# EAGLE board BackscatterPlantSensor_v6_1tssop (EAGLE 6.4)
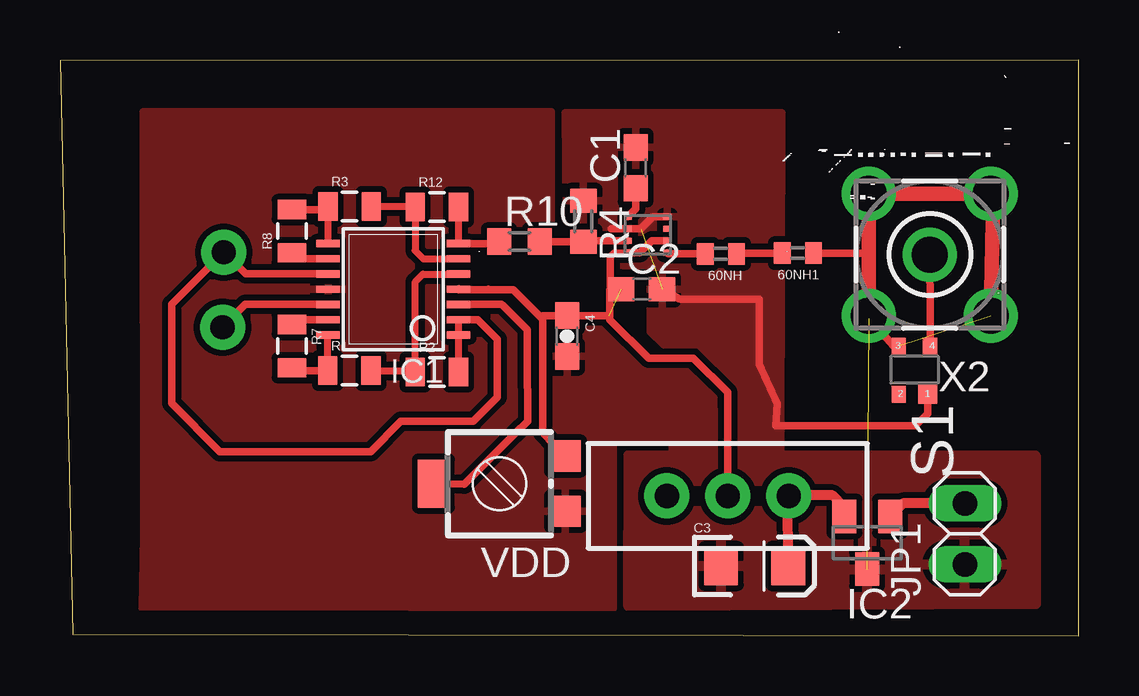
[diagram p0: board, top side]

Size 42.44 x 23.99 mm. Coordinates in mm from the lower left corner, seen from the top.
Outline: 0.53,0.05 42.44,0 42.44,23.99 0,23.95 0.53,0.05
Copper layers (1*16): Top 0.035mm / dielectric 1.5mm / Bottom 0.035mm
Design rules "default *": minimum track width 10mil, minimum drill 24mil, track to track 10mil, track to pad 10mil, pad to pad 10mil, via to via 10mil, smd to smd 10mil, copper to edge 40mil, drill to drill 8mil, minimum pad ring 10mil, minimum via ring 8mil, stop-mask expansion 4mil, vias tented up to drill 0mil, thermal gap 10mil

## Footprints (pad centres in the part's own frame; a part is rotated, then mirrored left to right if it is on the bottom)
C0402 = smd 0.7 x 0.9: 1 -0.65,0; 2 0.65,0
C0603 = smd 1.1 x 1: 1 -0.85,0; 2 0.85,0
EIA3216 = smd 1.4 x 1.6: A 1.4,0; C -1.4,0
0603-CAP = smd 1.1 x 1: 1 -0.85,0; 2 0.85,0
TSSOP14 = smd 0.305 x 0.991: 1 -1.905,-2.718; 2 -1.27,-2.718; 3 -0.635,-2.718; 4 0,-2.718; 5 0.635,-2.718; 6 1.27,-2.718; 7 1.905,-2.718; 8 1.905,2.718; 9 1.27,2.718; 10 0.635,2.718; 11 0,2.718; 12 -0.635,2.718; 13 -1.27,2.718; 14 -1.905,2.718
SOT23 = smd 1 x 1.4: 1 -0.95,-1.1; 2 0.95,-1.1; 3 0,1.1
1X02 = drill 1.016 long: 1 -1.27,0; 2 1.27,0
0805 = smd 0.8 x 1.2: 1 -0.9,0; 2 0.9,0
R0603 = smd 1 x 1.1: 1 -0.85,0; 2 0.85,0
SWITCH-SPDT = drill 1.016 pad 1.88: 1 0,2.54; 2 0,0; 3 0,-2.54
TDFN22-8 = smd 0.35 x 0.25: 1 -1.78,-0.7; 2 -1.78,-1.2; 3 -1.78,-1.7; 4 -1.78,-2.2; 5 -0.13,-2.2; 6 -0.13,-1.7; 7 -0.13,-1.2; 8 -0.13,-0.7
SOT343R = smd 0.8 x 0.8: 1 0.55,-1.07 | smd 0.6 x 0.7: 2 -0.66,-1.07; 3 -0.66,0.94; 4 0.65,0.94
1X01NS = drill 1.016 pad 1.88: 1 0,0
RTRIM3314G = smd 1.3 x 1.3: 1 1.15,-2.75; 3 -1.15,-2.75 | smd 2 x 1.3: 2 0,2.75
LTI-SASF54GT = drill 1.5 pad 2.2: 1 0,0; 2 -2.54,2.54; 3 2.54,2.54; 4 2.54,-2.54; 5 -2.54,-2.54

## Placement (x,y rotation side)
60NH  [C0402]  27.53,15.91 180 top
60NH1  [C0402]  30.74,15.94 180 top
C1  [C0603]  23.99,19.5 90 top
C2  [C0603]  24.23,14.44 0 top
C3  [EIA3216]  28.94,2.91 0 top
C4  [0603-CAP]  21.12,12.48 270 top
IC1  MCP604ST  [TSSOP14]  13.88,14.44 90 top
IC2  MAX6520  [SOT23]  33.63,3.88 180 top
JP1  [1X02]  37.7,4.24 90 top
R1  100K  [0805]  12.06,11.05 0 top
R2  100K  [0805]  15.7,10.99 0 top
R3  100K  [0805]  12.06,17.89 0 top
R4  [R0603]  21.81,17.27 270 top
R7  50K  [0805]  9.66,12.07 270 top
R8  50K  [0805]  9.66,16.86 90 top
R10  [R0603]  19.14,16.43 0 top
R12  100K  [0805]  15.7,17.87 0 top
S1  [SWITCH-SPDT]  27.83,5.83 270 top
U$1  [TDFN22-8]  23.53,15.26 180 top
U$4  BF1118SOT343R_NXP  [SOT343R]  35.61,11.13 0 top
V+  M01SMDNS  [1X01NS]  6.77,12.85 0 top
V-  M01SMDNS  [1X01NS]  6.82,15.98 270 top
VDD  [RTRIM3314G]  18.31,6.34 90 top
X2  LTI-SASF54GT  [LTI-SASF54GT]  36.24,15.88 180 top

## Library data of the parts
60NH 60NH1 R1-R3 R7 R8 R12 = SparkFun
C1 C2 = eagle-ltspice; SPICEMODEL: NONE; SPICEPREFIX: C
C3 = SparkFun-Capacitors
C4 = SparkFun-Passives
IC1 = linear
IC2 = maxim; MF: MAXIM; MPN: MAX6520EUR-T; OC_FARNELL: unknown; OC_NEWARK: 02J4586
JP1 = pinhead
R4 R10 VDD = rcl
S1 = semipassiveTag_library
U$1 = ts3002TDFN22_8pin
U$4 = rf_transistors
V+ V- = SparkFun-Connectors
X2 = con-coax; OC_FARNELL: unknown; OC_NEWARK: unknown

## Nets
AGND: C4.2 IC1.11 VDD.3
DGND: C1.2 C2.2 R4.1 U$1.4 U$1.6 U$4.1
DRAIN: U$4.4 X2.1
FOUT: 60NH.2 U$1.1
FOUT2: 60NH1.1 U$4.3 X2.2
GND: C3.C IC2.3 JP1.1 X2.3 X2.4 X2.5
N$1: C1.1 U$1.5
N$2: R4.2 R10.2 U$1.7
N$3: 60NH1.2 60NH.1
N$4: IC2.1 JP1.2
N$7: C3.A IC2.2 S1.1
N$12: IC1.3 VDD.2
N$13: IC1.13 R7.1
N$15: IC1.5 R1.2 R2.1
N$92: IC1.9 R8.1
N$93: IC1.8 R3.1 R8.2
N$96: IC1.14 R1.1 R7.2
N$100: IC1.6 R3.2 R12.1
V+: IC1.12 V+.1
VCOND: IC1.7 R10.1 R12.2
VDD: C2.1 C4.1 IC1.4 S1.2 U$1.2 U$1.8 VDD.1
VRF: IC1.1 IC1.2 IC1.10 R2.2 V-.1

## Tracks (layer width: path | path; a pad name or v marks a point on that pad's centre or on a via)
AGND
  pour Top: 23.05,8.27 27.27,8.23 27.25,9.91 26.06,11.05 24.66,11.06 23.14,12.58 23.14,15.2 23.02,15.33 20.47,15.33 20.47,21.84 3.46,21.82 3.48,4.2 3.43,1.15 6.17,1.15 23.05,1.13
DGND  (1 unrouted)
  Top 0.305: U$1.4 24.69,17.46 24.2,16.97 U$1.6 22.97,16.96 | 25.78,14.04 C2.2 25.87,14.02 29.14,14.02 29.12,11.31 29.89,9.67 29.83,8.74 35.64,8.74 36.16,9.26 U$4.1
  pour Top: 21.05,21.79 21.11,15.47 24.59,15.4 24.59,12.67 25.16,12.12 26.61,12.12 28.3,10.45 28.44,8.27 30.03,8.16 30.06,21.79
DRAIN
  Top 0.305: U$4.4 36.26,13.48 X2.1
FOUT
  Top 0.305: 60NH.2 25.35,15.91 U$1.1
FOUT2  (1 unrouted)
  Top 0.305: 38.83,18.35 38.81,18.24 | U$4.3 34.73,12.07 33.77,13.2 33.75,13.66 33.7,13.72 33.7,15.84 33.69,15.85 | 33.81,15.98 33.69,15.85 | 33.69,15.85 33.69,15.9 | 33.69,15.9 33.7,15.91 | 60NH1.1 33.65,15.94 33.69,15.9
  Top 0.61: 38.81,18.24 38.88,18.29 X2.2
GND  (1 unrouted)
  Top 0.305: X2.3 33.7,13.23 33.72,13.22 33.67,13.22 33.66,13.23 33.66,13.35 33.64,13.37
  Top 0.61: X2.3 X2.4 X2.5
  pour Top: 23.69,7.54 40.66,7.52 40.66,1.31 23.69,1.23
N$1
  Top 0.305: U$1.5 23.99,17.79 C1.1
N$2
  Top 0.305: R10.2 20.11,16.42 R4.2 22.17,16.46 U$1.7
N$3
  Top 0.305: 60NH1.2 28.21,15.93 60NH.1
N$4
  Top 0.406: JP1.2 35.12,5.52 IC2.1
N$7
  Top 0.406: C3.A 30.31,5.8 S1.1 30.19,5.84 32.19,5.84 32.69,5.35 IC2.2
N$12
  Top 0.3: IC1.3 17.48,13.8
  Top 0.305: IC1.3 16.62,13.8 18.39,13.8 18.45,13.77 19.47,12.74 19.47,11.67 19.48,8.95 18.94,8.41 16.84,6.3 VDD.2
N$13
  Top 0.305: IC1.13 9.68,13.17 R7.1
N$14
  pour Top: 27.72,9.02 27.75,7.13 25.52,7.05 25.52,9.02
N$15
  Top 0.3: R2.1 14.8,14.75 15.11,15.06 16.59,15.06 IC1.5
  Top 0.305: R1.2 14.88,11.03 R2.1
N$21
  pour Top: 28.36,7.01 28.38,9.55 30,9.58 30.03,7.15 29.25,6.99 28.98,6.99
N$92
  Top 0.305: IC1.9 9.91,15.71 R8.1
N$93
  Top 0.3: R3.1 IC1.8
  Top 0.305: IC1.8 | R8.2 11.03,17.76 R3.1
N$96
  Top 0.3: R1.1 IC1.14
  Top 0.305: IC1.14 | R1.1 9.56,11.05 R7.2
N$100
  Top 0.3: R12.1 14.8,16.04 15.14,15.7 IC1.6
  Top 0.305: R3.2 R12.1
V+
  Top 0.305: V+.1 7.72,13.8 IC1.12
VCOND
  Top 0.3: R12.2 IC1.7
  Top 0.305: IC1.7 17.71,16.34 R10.1
VDD  (1 unrouted)
  Top 0.3: 16.62,14.42 IC1.4
  Top 0.305: 16.61,14.45 IC1.4 | 16.62,14.42 17.8,14.42 | 17.8,14.42 17.84,14.43 | U$1.2 24.66,16.46 24.17,15.96 U$1.8 23.08,15.95 22.92,15.79 22.91,13.16 | 17.8,14.42 18.85,14.41 18.88,14.41 20.03,13.27 20.11,13.34 | S1.2 27.81,10.13 26.39,11.56 24.52,11.55 22.91,13.16 | 20.11,13.34 C4.1 22.88,13.34 22.91,13.16 | 20.11,13.34 20.11,8.46 VDD.1
VRF
  Top 0.3: 16.59,11.05 IC1.1 IC1.2
  Top 0.305: 16.57,10.71 R2.2 16.59,11.05 | IC1.10 7.73,15.07 V-.1 4.66,13.82 4.66,9.7 6.66,7.67 12.95,7.67 14.2,8.94 17.22,8.94 18.22,9.94 18.22,12.34 17.4,13.17 IC1.2